# Altium PCB uku20710_face.PcbDoc
Units mm, origin at the board's own origin, x right, y up, seen from the top; angles counter-clockwise.
Board outline 354.7 x 156.7 mm, 2 copper layers (Top Layer, Bottom Layer); 57 components, 517 nets, 242 pads, 122 vias.
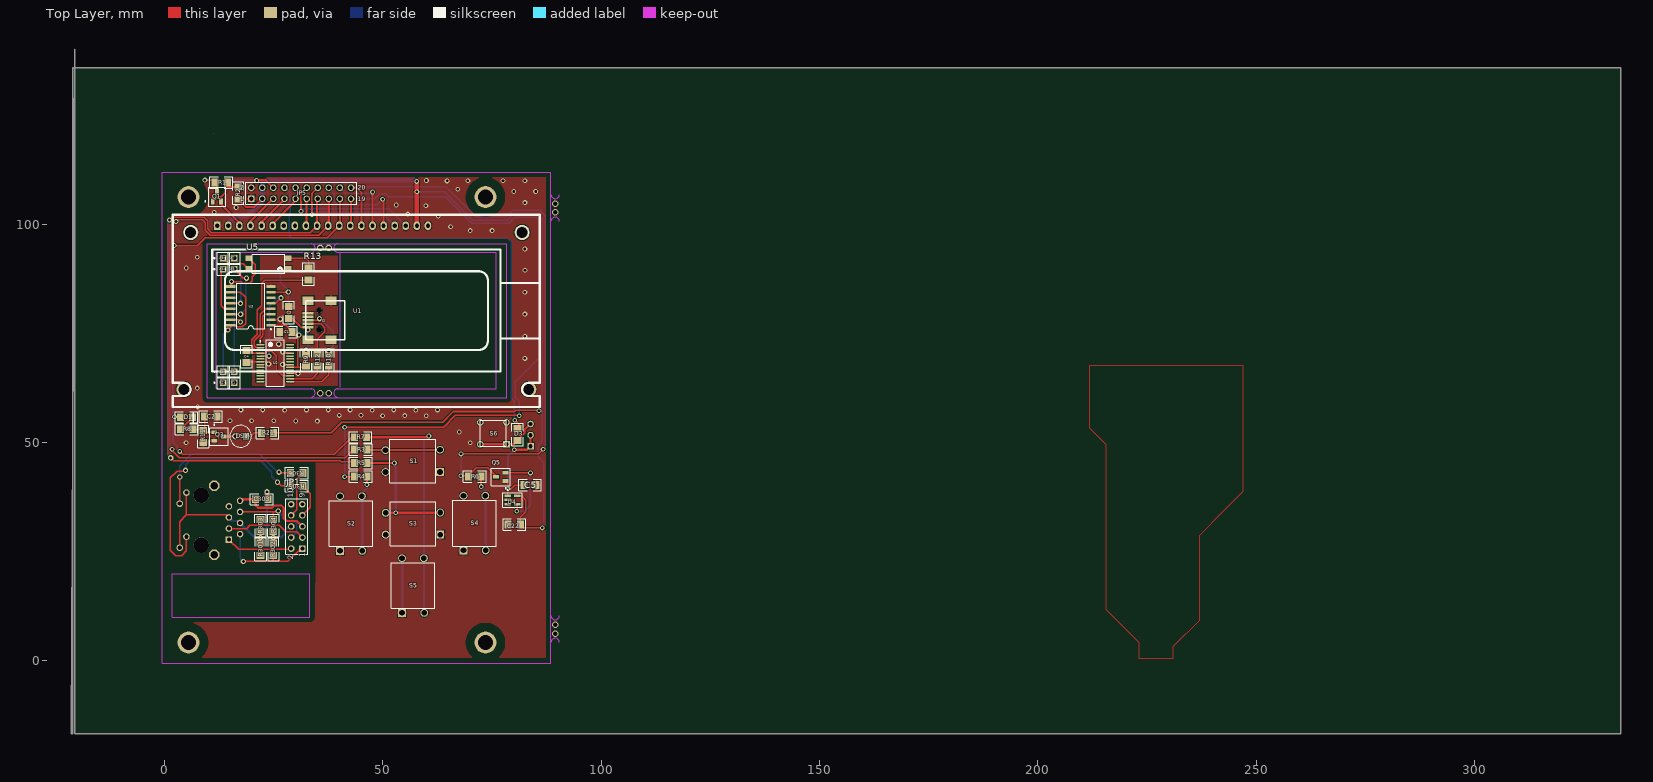
[diagram p0: Top Layer view]
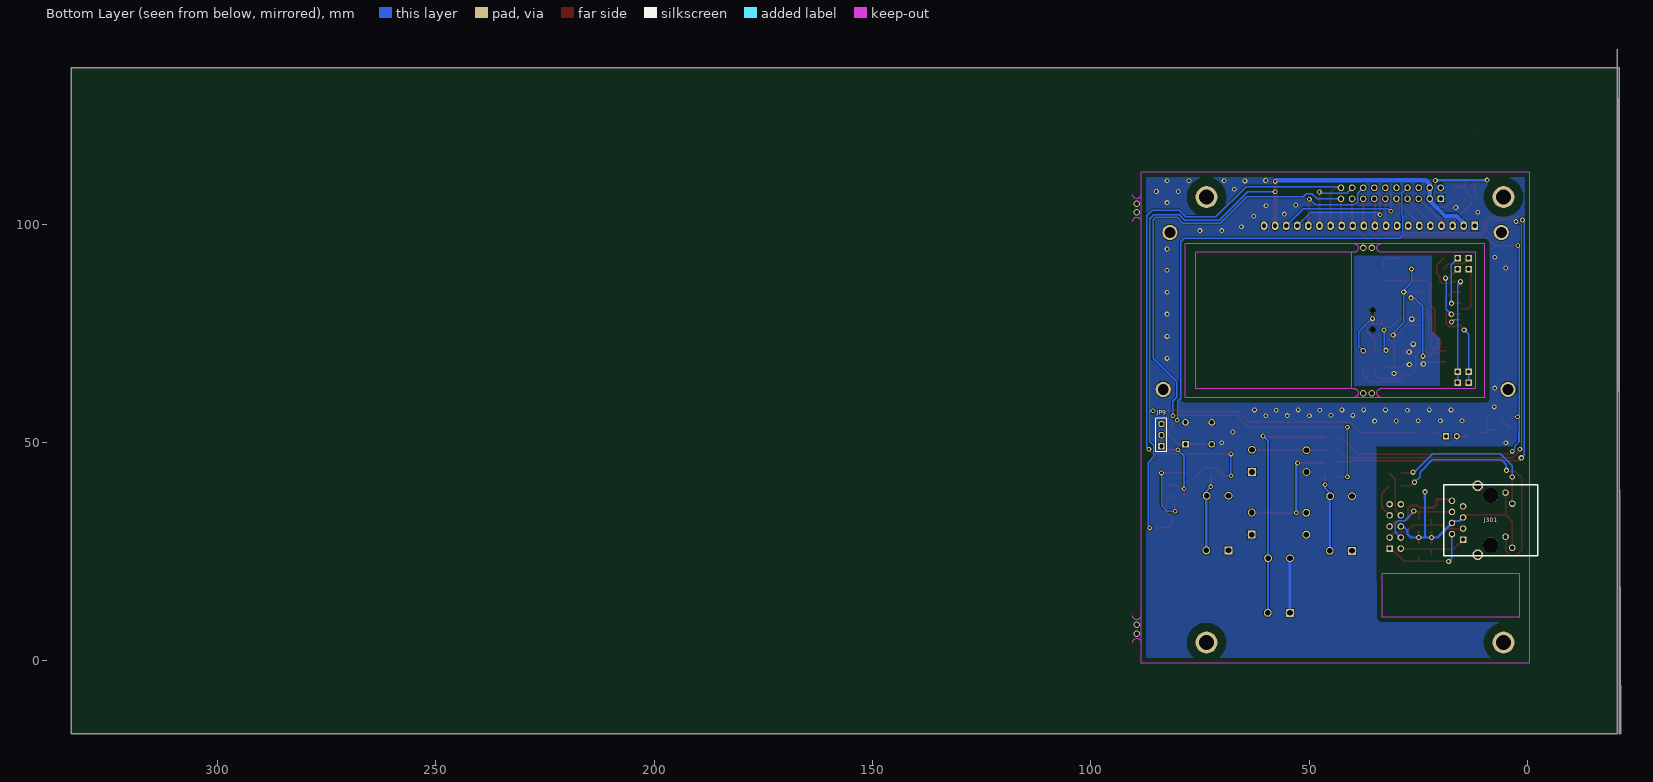
[diagram p1: Bottom Layer view, seen from below]

## Layer stack, top to bottom
Top Layer: signal copper 0.0356
Dielectric: dielectric 0.32, FR-4, Dk 4.8
Bottom Layer: signal copper 0.0356

## Board outline
-20.6,140 -20.6,-16.7 333.4,-16.7 333.4,135.85 -20.95,135.85 -20.95,-16.7 -21.3,-16.7

## Design rules (kind name [scope] priority, off if disabled: settings)
Clearance Keep_out_usb [OnLayer('Keep-Out Layer') vs InPoly and InNet(GND_USB)] p1: gap=0.3
Clearance Keep_out_poly [OnLayer('Keep-Out Layer') vs InPoly] p2: gap=1
Clearance Holes [InPoly vs HasPad('Free-0') Or HasPad('Free-1') Or HasPad('Free-2') Or HasPad('Free-3')] p3: gap=2
Clearance Keep_Out [OnLayer('Keep-Out Layer')] p4: gap=0.45
Clearance "Для разъёма и индикатора" [InComponent(JP5) or InComponent(U2)] p5: gap=0.3
Clearance [All] p6: gap=0.2
ComponentClearance [All] p1: gap=0.254 collisioncheckmode=0
HoleSize [All] p1: absolutevalues=TRUE maxlimit=5 minlimit=0.025 maxpercent=80.000 minpercent=20.000
PolygonConnect [InComponent(J1) and HasPad('J1-5')] p1: connectstyle=Relief reliefconductorwidth=0.3 reliefentries=4 polygonreliefangle="90 Angle"
PolygonConnect PolygonConnect_1 [All] p2: connectstyle=Relief reliefconductorwidth=0.5 reliefentries=4 polygonreliefangle="90 Angle"
RoutingLayers [All] p1: top layer=Horizontal bottom layer=Vertical
RoutingVias [All] p1: holewidth=0.7 width=1.2 viastyle="Through Hole" minholewidth=0.6 minwidth=1.1 maxholewidth=0.7 maxwidth=1.2
SolderMaskExpansion [All] p1: expansion=0.102
TestPointUsage [All] p1: valid=0 allowmultiple=FALSE
Testpoint [All] p1: side=15 testpointundercomponent=TRUE minsize=1.016 maxsize=2.54 preferedsize=1.524 minholesize=0 maxholesize=1.016 preferedholesize=0.813 testpointgrid=0.025 style=1023 order=1234567890
Width [All] p1: maxlimit=2 minlimit=0.2 preferedwidth=0.254 toplayer_prefwidth=0.3 bottomlayer_prefwidth=0.3 minimp=50.000000 maximp=50.000000 favimp=50.000000
15 further rules are at their usual default settings.

## Classes and differential pairs
component class USB: C1 C3 C4 J1 R9 R10 R12 R13 U2 U3 U5 X1 X2 X3 X4 X5 X6 X7 X8
component class uku206: A? BT? C2 C5 C22 D1 D3 DS1 JP5 JP9 Q1 Q3 Q5 R1 R2 R3 R4 R5 R6 R7 R8 R11 R21 S1 S2 S3 S4 S5 S6 U1 U4 UU1 UU3 UU5 UU7 UU9
component class LAN: C303 J301 JP1 R301 R302 R303 R304 R305 R306

## Components (designator, comment, footprint, x,y, rotation, side; value= is the part's Value field where it differs from the comment)
C1 "1.0" _1206#1 27.807,75.319 r0 top
C2 "1.0" _1206#2 10.603,55.914 r180 top
C3 "1.0" C3216-1206 28.457,79.77 r270 top
C4 "1.0" C3216-1206 18.755,69.668 r90 top
C5 "1.0" _1206#1 83.697,40.26 r180 top
C22 "1.0" _1206#1 80.1,31.25 r180 top (schematic designator C?)
C303 "0.1" C3216-1206 22.25,37 r0 top
D1 "LL4148" _1206d#1 5.048,55.778 r180 top
D3 "LL4148" _1206d#2 80.85,51.85 r90 top
DS1 "LED0" el3 18.697,51.427 r180 top
J1 "miniUSB" USBmini 41.31,78 r90 top
J301 "J0011D21B" J0011D21B 8.402,32.208 r270 bottom
JP1 "Header 10H" HDR2X5 31.558,25.706 r90 top
JP5 "PLHD-20" HDR2X10 19.85,105.8 r0 top
JP9 "PLS-3" HDR1X3 83.821,49.162 r90 bottom
Q1 "BC856" SO-G3#1 12,106.3 r0 top
Q3 "BC846" SO-G3#2 12.5,51.377 r270 top
Q5 "IRLML2402" SO-G3#1 77,42.15 r90 top (schematic designator Q?)
R1 "2K2" _1206#3 13,109.5 r0 top (schematic designator R90)
R2 "7K5" _1206#3 16.9,107.1 r270 top (schematic designator R89)
R3 "2K7" _1206#1 44.95,48.4 r180 top
R4 "2K7" _1206#1 44.95,42.2 r180 top
R5 "2K7" _1206#1 44.95,45.3 r180 top
R6 "2K7" _1206#1 71.05,42.2 r180 top
R7 "2K7" _1206#3 44.9,51.2 r180 top (schematic designator R11)
R8 "2K7" _1206#2 5.097,53.027 r180 top
R9 "1R" _1206#1 32.408,68.867 r270 top
R10 "20R" _1206#1 37.609,68.867 r270 top
R11 "10K" _1206#2 8.897,51.377 r270 top
R12 "20R" _1206#1 35.009,68.867 r270 top
R13 "200R" _1206#1 33.008,88.572 r90 top (schematic designator R?)
R21 "270R" _1206#2 23.603,52.227 r0 top
R301 "49.9R" _1206#1 22.006,25.556 r90 top
R302 "49.9R" _1206#1 24.906,25.556 r270 top
R303 "49.9R" _1206#1 22.006,30.958 r270 top
R304 "49.9R" _1206#1 24.906,31.008 r90 top
R305 "K10" _1206#1 30.3,40.05 r0 top
R306 "K10" _1206#1 30.3,43.05 r0 top
S1 "SWT-9" SWT-9 63.1,43.25 r180 top (schematic designator S2)
S2 "SWT-9" SWT-9 40.2,25.2 r90 top (schematic designator S4)
S3 "SWT-9" SWT-9 63.15,28.9 r180 top (schematic designator S1)
S4 "SWT-9" SWT-9 68.47,25.3 r90 top (schematic designator S5)
S5 "SWT-9" SWT-9 54.4,11 r90 top (schematic designator S3)
S6 "SWT-6" SWT-6 78.3,49.6 r180 top
U1 "AG1232G" AG1232G 43.95,80.2 r0 top (schematic designator U4)
U2 "FT232R" SOP65P780-28L 25.356,68.167 r0 top
U3 "ISO7231" SO-G16/D10.4 19.755,81.27 r90 top
U4 "TPS3823" SO-G5/P.95 79.7,36.85 r270 top (schematic designator U?)
U5 "FOD817ASD" FOD817ASD 28.307,89.723 r90 top
X1 "" PIN1 16,63.7 r90 top
X2 "" PIN1 13.5,63.7 r90 top
X3 "" PIN1 16,66.2 r90 top
X4 "" PIN1 13.5,66.2 r90 top
X5 "" PIN1 16,89.7 r90 top
X6 "" PIN1 13.5,89.7 r90 top
X7 "" PIN1 16,92.2 r90 top
X8 "" PIN1 13.5,92.2 r90 top

## Footprints (in the part's own frame and the unit in brackets; to place one, negate y for a bottom-side part, rotate by r counter-clockwise, add the part's x,y. Pads: shape width x height; smd on the part's side, far side on the other; paste and mask are expansions set on the pad)
_1206#1 [mm]
  rect 1.6x1.8 smd: 1(-1.412,-0.007) 2(1.388,-0.007)
  silkscreen extent -2.61,-1.31 2.59,1.29
_1206#2 [mm]
  rect 1.6x1.8 smd: 1(-1.409,-0.014) 2(1.391,-0.015)
  silkscreen extent -2.61,-1.31 2.59,1.29
_1206#3 [mm]
  rect 1.6x1.8 smd: 1(-1.4,0) 2(1.4,0)
  silkscreen extent -2.6,-1.3 2.6,1.3
_1206d#1 [mm]
  rect 1.6x1.8 smd: 1(1.403,-0.017) 2(-1.397,-0.017)
  silkscreen extent -2.6,-1.32 2.6,1.28
_1206d#2 [mm]
  rect 1.6x1.8 smd: 1(1.405,0.012) 2(-1.395,0.012)
  silkscreen extent -2.6,-1.29 2.6,1.31
AG1232G [mm]
  rect 1.5x2 hole 0.95: 1(-31.877,19.431)
  oval 1.5x2 hole 0.95: 2(-29.337,19.431) 3(-26.797,19.431) 4(-24.257,19.431) 5(-21.717,19.431) 6(-19.177,19.431) 7(-16.637,19.431) 8(-14.097,19.431) 9(-11.557,19.431) 10(-9.017,19.431) 11(-6.477,19.431) 12(-3.937,19.431) 13(-1.397,19.431) 14(1.143,19.431) 15(3.683,19.431) 16(6.223,19.431) 17(8.763,19.431) 18(11.303,19.431) 19(13.843,19.431) 20(16.383,19.431)
  silkscreen extent -42.04,-22.1 41.96,21.97
C3216-1206 [mm]
  rect 1.6x1.8 smd: 1(-1.4,0) 2(1.4,0)
  silkscreen extent -2.6,-1.3 2.6,1.3
el3 [mm]
  rect 1.4x1.4 hole 0.85: 1(0.012,-0.009)
  round 1.4 hole 0.85: 2(2.512,-0.009)
  silkscreen extent -1.24,-2.51 3.76,2.49
FOD817ASD [mm]
  rect 1.3x1.5 smd: 1(0,0) 2(2.5,0) 3(2.5,9) 4(0,9)
  silkscreen extent -0.97,0.75 3.4,8.22
HDR1X3 [mm]
  rect 1.5x1.5 hole 1: 1(0,0)
  round 1.5 hole 1: 2(2.54,0) 3(5.08,0)
  silkscreen extent -1.27,-1.27 6.35,1.27
HDR2X5 [mm]
  rect 1.5x1.5 hole 0.9: 1(0,0)
  round 1.5 hole 0.9: 2(0,2.54) 3(2.54,0) 4(2.54,2.54) 5(5.08,0) 6(5.08,2.54) 7(7.62,0) 8(7.62,2.54) 9(10.16,0) 10(10.16,2.54)
  silkscreen extent -1.27,-1.27 11.43,3.81
HDR2X10 [mm]
  rect 1.5x1.5 hole 1: 1(0,0)
  round 1.5 hole 1: 2(0,2.54) 3(2.54,0) 4(2.54,2.54) 5(5.08,0) 6(5.08,2.54) 7(7.62,0) 8(7.62,2.54) 9(10.16,0) 10(10.16,2.54) 11(12.7,0) 12(12.7,2.54) 13(15.24,0) 14(15.24,2.54) 15(17.78,0) 16(17.78,2.54) 17(20.32,0) 18(20.32,2.54) 19(22.86,0) 20(22.86,2.54)
  silkscreen extent -1.27,-1.27 24.13,3.81
J0011D21B [mm]
  round 2.5 hole 1.8: 0(-7.9,-3) 0(7.9,-3)
  round 3.5 hole 3.5: 0(-5.7,0) 0(5.7,0)
  rect 1.5x1.5 hole 0.95: 1(4.445,-6.35)
  round 1.5 hole 0.95: 2(3.175,-8.9) 3(1.905,-6.35) 4(0.635,-8.9) 5(-0.635,-6.35) 6(-1.905,-8.9) 7(-3.175,-6.35) 8(-4.445,-8.9) 9(6.31,4.9) 10(3.77,3.38) 11(-3.8,4.9) 12(-6.31,3.38)
  silkscreen extent -8.1,-10.8 8.1,10.8
PIN1 [mm]
  rect 1.5x1.5 hole 0.9: 1(0,0)
  silkscreen extent -1.4,-1.4 1.4,2.17
SO-G3#1 [mm]
  rect 0.85x1.3 smd: 1(-0.948,-1.102) 2(0.952,-1.102) 3(0.002,1.098)
  silkscreen extent -2.77,-2.15 2,2.15
SO-G3#2 [mm]
  rect 0.85x1.3 smd: 1(-0.944,-1.105) 2(0.956,-1.105) 3(0.006,1.095)
  silkscreen extent -2.77,-2.16 2.01,2.14
SO-G5/P.95 [mm]
  rect 0.55x1.45 smd: 1(-0.95,-1.075) 2(0,-1.075) 3(0.95,-1.075) 4(0.95,1.075) 5(-0.95,1.075)
  silkscreen extent -2.42,-2.2 1.65,2.2
SO-G16/D10.4 [mm]
  rect 0.6x2.15 smd: 1(-4.445,-4.625) 2(-3.175,-4.625) 3(-1.905,-4.625) 4(-0.635,-4.625) 5(0.635,-4.625) 6(1.905,-4.625) 7(3.175,-4.625) 8(4.445,-4.625) 9(4.445,4.625) 10(3.175,4.625) 11(1.905,4.625) 12(0.635,4.625) 13(-0.635,4.625) 14(-1.905,4.625) 15(-3.175,4.625) 16(-4.445,4.625)
  silkscreen extent -5.42,-4.75 5.2,3.15
SOP65P780-28L [mm]
  oval 1.8x0.35 smd: 1(-3.396,4.231) 2(-3.396,3.581) 3(-3.396,2.931) 4(-3.396,2.281) 5(-3.396,1.631) 6(-3.396,0.981) 7(-3.396,0.331) 8(-3.396,-0.319) 9(-3.396,-0.969) 10(-3.396,-1.619) 11(-3.396,-2.269) 12(-3.396,-2.919) 13(-3.396,-3.569) 14(-3.396,-4.219) 15(3.404,-4.219) 16(3.404,-3.569) 17(3.404,-2.919) 18(3.404,-2.269) 19(3.404,-1.619) 20(3.404,-0.969) 21(3.404,-0.319) 22(3.404,0.331) 23(3.404,0.981) 24(3.404,1.631) 25(3.404,2.281) 26(3.404,2.931) 27(3.404,3.581) 28(3.404,4.231)
  silkscreen extent -3.52,-5.29 2.1,5.31
SWT-6 [mm]
  rect 1.5x1.5 hole 1: 1(-0.009,-0.001)
  round 1.5 hole 1: 1(5.991,-0.001) 2(-0.009,-5.001) 2(5.991,-5.001)
  silkscreen extent -0.01,-5.5 5.99,0.5
SWT-9 [mm]
  rect 1.8x1.8 hole 1.3: 1(0,0)
  round 1.8 hole 1.3: 1(12.5,0) 2(0,-5.08) 2(12.5,-5)
  silkscreen extent 1,-7.5 11.5,2.5
USBmini [mm]
  round 1.2 hole 1.2: 0(-2.2,5.85) 0(2.2,5.85)
  rect 0.5x2.5 smd: 1(-1.6,8.43) 2(-0.8,8.43) 3(0,8.43) 4(0.8,8.43) 5(1.6,8.45)
  rect 2x2.5 smd: 6(-4.45,8.43) 6(-4.45,3.158) 6(4.45,8.43) 6(4.45,3.158)
  silkscreen extent -4.45,0 4.45,9

## Part data
C1 C3 C4 C303: library part "Cap Semi", "Capacitor (Semiconductor SIM Model)"
C2 C5 C22: library part "Cap Semi", "Capacitor"
D1: library part Diode, "Diode"
D3: library part Diode, "Default Diode"
DS1: "Typical INFRARED GaAs LED"
J1: library part "Header 6", "Header, 6-Pin"
JP1: "Header, 10-Pin, Right Angle"
JP5: library part "Header 10X2", "Header, 10-Pin, Dual row"
JP9: library part "Header 3", "Header, 3-Pin"
Q1: library part GT109
Q3: library part GT122, "Bipolar transistor"
Q5: "HEXFET Power MOSFET"
R1 R2 R3 R4 R5 R6 R7 R8 R11 R21 R301 R302 R303 R304 R305 R306: library part Res2, "Resistor"
R9 R10 R12 R13: library part RES
S1 S2 S3 S4 S5: "Switch"
S6: library part SWT-9, "Switch"
U4: "Reset IC"
U5: library part F00817ASD
X1 X2 X3 X4 X5 X6 X7 X8: library part Socket, "Socket"

## Free pads (board coordinates)
  round 5 hole 3.5: 0(5.5,4.2) 0(5.5,106.2) 0(73.5,4.2) 0(73.5,106.2)
  round 3.5 hole 2.5: 51(6,98.1) 52(4.45,62.15) 53(83.4,62.15) 54(81.9,98.1)

## Via types
v1: diameter 1.1, hole 0.6, Top Layer to Bottom Layer, 82 vias
v2: diameter 1.2, hole 0.7, Top Layer to Bottom Layer, 30 vias
v3: diameter 1.5, hole 1, Top Layer to Bottom Layer, 8 vias
v4: diameter 1.27, hole 0.711, Top Layer to Bottom Layer, 2 vias

## Nets (pads, with @x,y where several pads share a name; then routed paths per layer and width w, separated by ;. In a path a pad name is that pad's centre, name@x,y a point inside that pad or via, vN(x,y) a via of type N, cw(c..) or ccw(c..) an arc to the next point about the centre after c; other vN are vias at no path point)
+1.8V: 
+3.3V: 
+3V3: 
+5V: 
+5V_IZ: 
+IAKB1: 
+IAKB2: 
+UOUT: 
-5V: 
-5V_IZ: 
-IAKB1: 
-IAKB2: 
-UOUT: 
BAT: 
CANH: 
CANL: 
DB0: JP5.13 R5.2 U1.10 | length 140.9
  Top Layer w0.3: v2(1.175,100.925) 1.775,101.525 9.15,101.525 9.875,100.8 9.875,98.9 10.725,98.05 33.352,98.05 U1.10 ; v2(1.425,46.5) 2.075,45.85 40.125,45.85 40.425,45.55 43.319,45.55 R5.2
  Top Layer w0.5: U1.10 34.933,105.643 JP5.13
  Bottom Layer w0.3: v2(1.175,100.925) 0.775,100.525 0.775,47.15 v2(1.425,46.5)
DB1: JP5.15 R3.2 U1.11 | length 141.3
  Top Layer w0.3: v1@1.8,48.5 v1(1.75,48.45) 1.75,48.162 3.351,46.562 41.41,46.562 43.361,48.512 R3.2@43.511,48.512 ; v1(2.65,100.6) 3,100.95 8.775,100.95 9.35,100.375 9.35,98.65 10.5,97.5 35.342,97.5 U1.11
  Top Layer w0.5: U1.11 37.63,99.788 JP5.15
  Bottom Layer w0.25: v1(1.75,48.45) 1.3,48.9 1.3,99.7 2.2,100.6 v1(2.65,100.6)
DB2: D1.1 JP5.17 R7.2 U1.12 | length 137.5
  Top Layer w0.3: v1(2.25,95.1) 7.5,95.1 9.3,96.9 37.282,96.9 U1.12 ; v1(2.286,55.914) 2.301,55.9 3.614,55.9 D1.1@3.65,55.864 ; v1(3.501,47.962) 4.201,47.262 38.91,47.262 42.848,51.2 R7.2
  Top Layer w0.5: U1.12 40.17,99.788 JP5.17
  Bottom Layer w0.3: 1.9,52.713 1.9,55.914 v1@1.9,55.964 ; v1(2.25,95.1) 1.9,94.75 v1@1.9,55.964 ; v1(2.286,55.914) 2.251,55.914 2.201,55.964 v1@1.9,55.964
  Bottom Layer w0.4: 1.95,52.713 1.95,50.212 2.95,49.213 2.95,48.513 v1(3.501,47.962)
DB3: JP5.19 R4.2 U1.13 | length 155.6
  Top Layer w0.3: v1(41.25,42.15) 41.307,42.207 R4.2 ; v1(41.25,53.5) 63.9,53.5 66.6,56.2 81.2,56.2 v1(81.25,56.15)
  Top Layer w0.5: U1.13 42.71,99.788 JP5.19
  Bottom Layer w0.3: v1(41.25,42.15) v1(41.25,53.5) ; JP5.19@42.65,105.85 42.7,105.8 JP5.19 48.15,105.8 49.35,107 50.65,107 51.4,106.25 64.3,106.25 70.3,100.25 78.9,100.25 80.25,101.6 85.1,101.6 85.65,101.05 85.65,69.25 80.35,63.95 80.35,60.4 81.25,59.5 v1(81.25,56.15)
DB4: JP5.20 Q5.3 R6.2 U1.14 | length 146.9
  Top Layer w0.3: v1(67.85,42.4) 67.9,42.35 69.55,42.35 71.4,44.2 74.05,44.2 75.85,42.4 75.85,42.152 Q5.3@75.85,42.1 ; v1(67.9,47.4) 85.65,47.4 v1(86.7,48.45)
  Top Layer w0.4: JP5.20@42.69,108.34 JP5.20 ; JP5.20@42.7,108.33 JP5.20 ; U1.14 45.093,107.257 44.01,108.34 JP5.20
  Bottom Layer w0.3: JP5.20 42.97,108.6 64.45,108.6 71.35,101.7 78.3,101.7 79.8,103.2 85.95,103.2 86.95,102.2 87.2,101.95 ; v1(67.85,42.4) 67.9,42.45 v1(67.9,47.4) ; v1(86.7,48.45) 87.2,48.95 ; 87.199,48.95 87.199,101.95
DB5: JP5.18 U1.15 | length 15.9
  Top Layer w0.4: U1.15 47.633,107.333 v1(47.65,107.35)
  Bottom Layer w0.3: JP5.18@40.1,108.35 40.11,108.34 JP5.18 41.433,107.077 47.377,107.077 v1(47.65,107.35)
DB6: JP5.16 U1.16 | length 21.9
  Top Layer w0.4: v1(49.95,105.7) 50.173,105.477 U1.16 50.154,99.65 U1.16@50.1,99.65
  Bottom Layer w0.3: JP5.16 38.9,107.07 38.9,105.15 39.65,104.4 48.65,104.4 v1(49.95,105.7)
DB7: JP5.14 U1.17 | length 27.2
  Top Layer w0.3: 33.75,104.976 33.75,106.468 33.759,106.477
  Top Layer w0.4: v1(33.75,102.15) 33.75,104.976 ; 33.759,106.477 33.759,107.008 JP5.14
  Bottom Layer w0.4: v1(33.75,102.15) 34.25,102.65 49.694,102.65 U1.17
DT1: 
DT2: 
DT3: 
DT4: 
DT5: 
GND_P: 
GND_USB: C1.1 C3.1 C4.1 J1.5 J1.6@38.153,82.45 U2.7 U2.18 U2.21 U2.25 U2.26 U3.2 U3.8 | length 12.7
  Top Layer w0.3: C4.1@18.805,68.267 19.036,68.498 23.325,68.498 v2(23.856,67.967) ; v2@27.057,70.718 v2(27.107,70.718) ; v2@27.207,67.867 27.226,67.848 U2.21 ; U2.26@28.707,71.118 27.507,71.118 v2(27.107,70.718) ; U2.18 30.426,65.898 v2@30.758,65.567 ; U2.25 27.376,70.448 v2(27.107,70.718)
  Bottom Layer w0.3: v2@27.057,70.718 v2(27.107,70.718)
  other v2: 30.597,65.817 27.057,67.867
  other v4: 26.157,72.518 26.497,78.27
NetA1_1: 
NetA1_2: 
NetBT2_1: 
NetBT2_2: 
NetBT700_1: 
NetC1_2: C1.2 R9.2 U2.20 U3.1 U3.7 U5.1 | length 41
  Top Layer w0.3: U3.1 27.801,76.825 C1.2@29.207,75.419 ; U3.7 28.333,84.445 v2@28.357,84.421 ; v2(26.557,89.723) U5.1 ; U2.20 32.19,67.198 R9.2@32.458,67.467 ; C1.2 30.323,74.184 30.558,73.949 30.558,67.217 ; v2@30.358,74.219 v2(30.758,74.619)
  Bottom Layer w0.3: v2(26.557,89.723) 26.557,86.65 28.357,84.85 28.357,77.369 30.758,74.969 v2(30.758,74.619)
  other v2: 28.357,84.471
NetC2_1: C2.1 C5.1 C22.2 JP5.1 JP5.2 Q3.2 R11.2 S1.1 S2.1 S3.1 S4.1 S5.1 S6.2 U1.1 U1.20 U4.2 | length 12.5
  Bottom Layer w0.6: S5.1@54.4,11 54.4,23.5 S5.1@54.4,23.505
  other v1: 4.951,49.963 70.018,49.963 67.517,52.413 35.009,54.9 30.05,54.914 15.004,54.964 19.95,54.964 25.006,55 49.95,56.114 59.95,56.114 55.014,56.164 40.01,56.2 45.011,56.264 27.507,57.4 47.562,57.4 57.514,57.4 17.504,57.464 22.506,57.464 32.508,57.464 37.509,57.464 42.511,57.464 52.513,57.464 62.516,57.464 7.602,58.165 7.502,62.466 82.521,69.267 82.521,74.3 82.521,79.4 82.521,84.4 82.55,89.423 5.001,89.973 7.502,92.4 82.521,94.3 70.018,98.525 75.019,98.525 65.517,99.4 62.666,101.8 55.714,102.3 11.403,102.726 16.404,103.8 59.85,104.226 53.05,104.376 82.521,104.926 79.97,107.477 84.971,107.477 67.167,108 64.716,109.9 69.468,109.928 77.52,109.928 82.521,109.928 59.965,110
NetC2_2: C2.2 Q3.1 R8.1 R11.1 | length 8.3
  Top Layer w0.3: R8.1@6.55,52.963 8.8,52.963 8.86,52.903 8.93,52.833 9.463,52.3 11.394,52.3 Q3.1@11.453,52.3
  Top Layer w0.4: R11.1@8.86,52.903 9.211,53.255 C2.2
NetC3_2: C3.2 J1.1 R9.1 | length 11.5
  Top Layer w0.3: C3.2 29.357,78.37 31.358,76.369 32.858,76.369 v2(32.858,75.769) ; R9.1 32.408,70.286 v2(32.408,71.118)
  Bottom Layer w0.3: v2(32.408,71.118) 32.408,71.218 32.858,71.668 v2(32.858,75.769)
NetC4_2: C4.2 U2.4 U2.17 | length 14.7
  Top Layer w0.3: C4.2 19.755,71.068 20.375,70.448 22.936,70.448 23.406,70.918 24.506,70.918 25.606,69.818 25.606,66.667 27.025,65.248 U2.17
NetC5_2: C5.2 JP9.1 JP9.2 Q5.1 U4.1 | length 23.9
  Top Layer w0.3: Q5.1@78.05,41.2 78.075,41.175 78.625,40.625 U4.1 ; Q5.1 Q5.1@78.149,41.202 ; v1@78.67,39.46 79.43,39.46 80.237,40.267 C5.2
  Top Layer w0.5: v1(80.07,48.362) 80.082,48.35 83,48.35 83.8,49.15 83.8,49.162 83.8,51.702 JP9.2@83.8,51.74
  Bottom Layer w0.5: v1(78.625,39.4) 78.625,46.917 v1(80.07,48.362)
NetC11_1: 
NetC11_2: 
NetC12_2: 
NetC14_2: 
NetC21_1: 
NetC22_1: C22.1 JP5.3 JP5.4 R2.2 R21.2 U1.2 U1.19 U4.5 | length 249.2
  Top Layer w0.3: U4.5@80.75,37.85 80.775,37.825 U4.5 81.75,37.8 82.75,36.8 82.75,34.15 81.5,32.9 81.5,31.257 81.5,31.25 81.503,31.247 82.3,30.45 v1(86.5,30.45)
  Top Layer w0.4: R21.2 38.159,52.212 40.61,54.664 63.716,54.664 66.152,57.1 80.135,57.1 80.4,57.364 85.65,57.364 v1(85.75,57.264)
  Top Layer w0.5: R2.2 18.7,103.9 20.49,103.9 JP5.3
  Top Layer w1: v1(57.75,109.8) 57.793,109.757 v1(57.793,107.4) U1.19
  Bottom Layer w0.3: v1(57.793,107.4) 64.1,107.4 70.6,100.9 78.5,100.9 79.8,102.2 85.55,102.2 86.5,101.25 86.5,50.3 85.6,49.4 85.6,46.7 86.9,45.4 86.9,30.65 86.7,30.65 v1(86.5,30.45)
  Bottom Layer w0.4: v1(85.75,57.264) 86.372,57.264 86.472,57.364
  Bottom Layer w1: U1.2 14.613,100.213 16.25,101.85 18.9,101.85 22.39,105.34 JP5.3 JP5.4 22.39,109.14 23.3,110.05 57.5,110.05 v1(57.75,109.8)
NetC23_1: 
NetC33_1: 
NetC35_2: 
NetC36_2: 
NetC50_2: 
NetC51_2: 
NetC52_2: 
NetC53_2: 
NetC61_1: 
NetC61_2: 
NetC62_2: 
NetC63_2: 
NetC66_1: 
NetC303_1: C303.1 J301.8 JP1.5 | length 19.6
  Top Layer w0.5: J301.8 17.649,37 C303.1 20.85,35.675 21.475,35.05 24.65,35.05 25.2,35.6 26.725,35.6 27.325,35 27.325,32.575 27.85,32.05 30.294,32.05 JP1.5
NetC303_2: C303.2 J301.4 J301.5 J301.9 J301.12 JP1.6 R301.2 R302.1 R303.2 R304.1 | length 58.5
  Top Layer w0.3: J301.9@3.475,25.85 3.475,31.875 5.022,33.422 ; J301.12 5.022,33.422 ; J301.5 14.173,33.422 5.022,33.422
  Top Layer w0.5: R303.2 21.999,26.957 R301.2 ; v2(23.5,38.7) 23.65,38.55 C303.2 ; R302.1 24.913,26.982 R304.1
  Bottom Layer w0.5: J301.5 15.57,32.025 16.85,32.025 J301.4 20.625,28.25 v2(24.9,28.25) 24.913,28.237 v2@24.913,28.2 ; 23.475,28.25 23.475,38.675 v2(23.5,38.7) ; v2@24.913,28.25 26.7,28.25 27.45,29 27.45,29.8 28.436,30.786 JP1.6
  other v2: 22,28.25
NetC500_2: 
NetC502_1: 
NetC502_2: 
NetC505_1: 
NetC505_2: 
NetC508_1: 
NetC510_1: 
NetC511_1: 
NetC511_2: 
NetC512_2: 
NetC513_2: 
NetC514_1: 
NetC516_1: 
NetC516_2: 
NetC517_1: 
NetC700_1: 
NetC700_2: 
NetC701_1: 
NetC702_1: 
NetC704_2: 
NetC705_2: 
NetC706_1: 
NetC707_1: 
NetC707_2: 
NetC709_1: 
NetC709_2: 
NetC710_1: 
NetC713_1: 
NetC714_1: 
NetC715_1: 
NetD1_2: D1.2 R8.2 | length 3.9
  Top Layer w0.3: R8.2@3.701,53 3.701,53.042 3.701,53.064 6.431,55.794 D1.2
NetD3_1: D3.1 JP5.8 | length 106.5
  Top Layer w0.5: v1@80.22,55.214 80.27,55.159 81.438,53.862 D3.1@81.438,53.305
  Bottom Layer w0.3: JP5.8 28.75,107.06 28.75,102.3 28.6,102.15 28.6,97.4 29.2,96.8 78.6,96.8 79.45,95.95 79.45,60.15 80.1,59.5 80.1,55.2 80.153,55.147 80.17,55.164 v1@80.22,55.214
  other v1: 80.22,55.114
NetD3_2: D3.2 JP9.3 S6.1 | length 13.7
  Top Layer w0.5: S6.1@72.309,49.601 78.309,49.601 80.009,49.601 D3.2@80.67,50.263 ; D3.2 80.838,50.538 82.4,52.1 82.4,52.88 83.792,54.272 JP9.3@83.8,54.28
NetD5_1: 
NetD20_2: 
NetD500_1: 
NetD500_2: 
NetD501_1: 
NetD503_1: 
NetD505_1: 
NetD505_2: 
NetD506_1: 
NetD700_1: 
NetD701_1: 
NetD702_1: 
NetD703_2: 
NetD704_1: 
NetD705_1: 
NetD706_1: 
NetDS1_1: DS1.1 R21.1 | length 3.8
  Top Layer w0.4: DS1.1 19.778,51.435 20.554,52.212 R21.1
NetDS1_2: DS1.2 Q3.3 | length 2.6
  Top Layer w0.4: Q3.3 16.111,51.37 16.181,51.44 DS1.2@16.204,51.463
NetFU500_1: 
NetFU700_1: 
NetFU700_2: 
NetJ1_2: J1.2 R12.1 | length 11
  Top Layer w0.3: J1.2 35.85,77.2 36.725,76.325 36.725,75.378 35.009,73.661 35.009,70.286 R12.1
NetJ1_3: J1.3 R10.1 | length 12.7
  Top Layer w0.3: J1.3 35.125,78 v2(35.475,78.35) ; R10.1 37.603,71.011 v2(37.609,71.018)
  Bottom Layer w0.3: v2(35.475,78.35) 35.635,78.35 38.66,75.325 38.66,72.068 v2(37.609,71.018)
NetJ301_1: J301.1 JP1.2 R301.1 | length 16.7
  Top Layer w0.3: J301.1 16.959,25.556 28.868,25.556 JP1.2 ; 22.006,25.556 22.012,25.55 R301.1
NetJ301_2: J301.2 JP1.1 R302.2 | length 22.7
  Top Layer w0.3: v2(18.055,22.756) 18.105,22.806 28.257,22.806 31.158,25.706 JP1.1 ; R302.2 24.9,22.812 24.906,22.806
  Bottom Layer w0.3: J301.2 17.302,23.508 v2(18.055,22.756)
NetJ301_3: J301.3 JP1.3 R303.1 | length 19.6
  Top Layer w0.3: J301.3 18.828,30.303 19.525,31 26.275,31 27.75,29.525 30.279,29.525 JP1.3 ; R303.1 R303.1@22.005,32.37 ; 22,31 R303.1@22,32.4
NetJ301_6: J301.6 JP1.4 R304.2 | length 19.7
  Top Layer w0.3: J301.6 25.861,34.113 v2(26.057,34.309) ; 24.9,34.113 24.913,34.1 R304.2
  Bottom Layer w0.3: v2(26.057,34.309) 26.057,34.118 28.125,32.05 29.55,32.05 30.25,31.35 30.25,29.479 JP1.4
NetJ301_10: J301.10 R305.1 | length 57.4
  Top Layer w0.3: v2(4.825,43.625) 4.675,43.475 2.95,43.475 1.375,41.9 1.375,25.3 2.575,24.1 3.9,24.1 5.022,25.222 J301.10 ; v2(25.9,40.9) 26.757,40.043 R305.1
  Bottom Layer w0.3: v2(4.825,43.625) 4.825,44.875 5.95,46 21.775,46 24.6,43.175 24.6,42.2 v2(25.9,40.9)
NetJ301_11: J301.11 R306.1 | length 37
  Top Layer w0.3: J301.11 v2(3.502,42.127) ; v2(26.2,43.2) 26.357,43.043 R306.1
  Bottom Layer w0.3: v2(3.502,42.127) 3.502,44.655 6.247,47.4 21.725,47.4 25.925,43.2 v2(26.2,43.2)
NetJP1_7: JP1.7 R305.2 | length 8.2
  Top Layer w0.3: JP1.7 33.425,35.194 33.425,38.325 31.697,40.053 R305.2@31.675,40.075
NetJP1_8: JP1.8 R306.2 | length 10.8
  Top Layer w0.3: JP1.8 30.3,34.609 30.3,41.55 31.688,42.938 R306.2
NetJP1_9: 
NetJP3_3: 
NetJP3_3: 
NetJP5_5: JP5.5 U1.4 | length 8.4
  Top Layer w0.5: U1.4 19.693,100.643 24.85,105.8 JP5.5
NetJP5_6: JP5.6 Q1.3 R1.1 | length 21
  Top Layer w0.4: v1(9.252,110.078) 10.972,110.078 11.575,109.475 11.6,109.45 R1.1@11.655,109.395
  Top Layer w0.5: Q1.3@12.049,107.102 12.049,107.398 R1.1@12.049,109.002 ; v1@21.1,110.05 23.22,110.05 JP5.6
  Bottom Layer w0.5: v1(9.252,110.078) 9.28,110.05 v1@21.1,110.05
  other v1: 21.1,110
NetJP5_7: JP5.7 U1.5 | length 8.3
  Top Layer w0.5: U1.5 22.233,100.433 27.47,105.67 JP5.7
NetJP5_9: JP5.9 U1.6 | length 8.3
  Top Layer w0.5: U1.6 24.773,100.123 30.01,105.36 JP5.9
NetJP5_10: JP5.10
NetJP5_11: JP5.11 U1.9 | length 6.2
  Top Layer w0.5: U1.9 32.55,99.788 JP5.11
NetJP5_12: JP5.12 U1.18 | length 31.8
  Top Layer w0.3: 31.25,105.176 31.25,106.527
  Top Layer w0.4: v1(31.25,102.95) 31.25,105.176 ; 31.25,106.527 31.25,107.04 JP5.12
  Bottom Layer w0.4: v1(31.25,102.95) 31.85,103.55 51.334,103.55 U1.18
NetJP11_1: 
NetQ1_1: Q1.1 R1.2 R2.1 | length 8.7
  Top Layer w0.3: Q1.1@11.052,105.252 12.05,106.25 12.998,106.25 13.95,107.202 13.95,107.75 14.4,108.2 14.4,108.5 R1.2@14.4,108.75
  Top Layer w0.4: Q1.1 Q1.1@11.052,105.252
  Top Layer w0.5: 14.4,108.5 R2.1 ; R1.2@14.4,108.75 R1.2
NetQ1_2: Q1.2 U1.3 | length 7
  Top Layer w0.5: Q1.2@12.999,104.902 12.999,104.502 17.153,100.347 U1.3
NetQ2_1: 
NetQ2_3: 
NetQ4_1: 
NetQ5_2: Q5.2 U4.4 | length 18.6
  Top Layer w0.3: Q5.2@78.1,43.15 78.125,43.125 78.2,43.05 v1(83.8,43.05) ; v1(80.65,34.25) 80.775,34.375 U4.4
  Bottom Layer w0.3: v1(80.65,34.25) 82.45,34.25 83.8,35.6 v1(83.8,43.05)
NetQ6_1: 
NetQ7_2: 
NetQ7_4: 
NetQ8_2: 
NetQ8_4: 
NetQ9_2: 
NetQ9_4: 
NetQ10_1: 
NetQ10_3: 
NetQ10_3: 
NetQ11_1: 
NetQ11_1: 
NetQ11_3: 
NetQ500_1: 
NetQ501_1: 
NetQ700_1: 
NetQ700_3: 
NetR3_1: R3.1 S1.2 | length 16.8
  Top Layer w0.5: R3.1 46.519,48.25 50.6,48.25 63.02,48.25 S1.2@63.1,48.33
NetR3_2: 
NetR3_2: 
NetR3_2: 
NetR3_2: 
NetR3_2: 
NetR3_2: 
NetR3_2: 
NetR4_1: R4.1 S2.2 | length 17.5
  Top Layer w0.5: S2.2@45.2,37.7 S2.2@45.28,37.62 ; v1(46.35,40.35) R4.1@46.35,42.15
  Bottom Layer w0.5: S2.2@45.28,25.2 45.28,37.7 45.28,38.43 46.35,39.5 v1(46.35,40.35)
NetR4_2: 
NetR5_1: R5.1 S3.2 | length 30.3
  Top Layer w0.5: R5.1 52.644,45.307 v1(52.65,45.3) ; S3.2@50.65,33.9 v1(52.95,33.9) 63.07,33.9 S3.2@63.15,33.98
  Bottom Layer w0.5: v1(52.65,45.3) 52.95,45 v1(52.95,33.9)
NetR5_2: 
NetR6_1: R6.1 S4.2 | length 17.4
  Top Layer w0.5: R6.1@72.45,42.25 72.45,42.207 72.45,40 v1(72.55,39.9)
  Bottom Layer w0.5: v1(72.55,39.9) 73.55,38.9 73.55,37.8 S4.2@73.55,25.3
NetR6_2: 
NetR7_1: R7.1 S5.2 | length 55.4
  Top Layer w0.6: R7.1 60.25,51.2 v1(60.55,51.5)
  Bottom Layer w0.5: S5.2@59.48,11 59.4,11.08 59.4,23.5 59.4,50.35 v1(60.55,51.5)
NetR7_2: 
NetR7_2: 
NetR8_1: 
NetR8_1: 
NetR8_2: 
NetR8_2: 
NetR10_2: R10.2 U2.15 | length 11.4
  Top Layer w0.3: U2.15 35.991,63.948 37.609,65.567 R10.2@37.609,67.467
NetR12_2: R12.2 U2.16 | length 8.4
  Top Layer w0.3: U2.16 33.791,64.598 35.009,65.817 R12.2@35.009,67.417
NetR13_1: R13.1 U2.3 | length 28.8
  Top Layer w0.3: U2.3 20.825,71.098 20.005,71.918 20.005,73.569 21.255,74.819 21.255,80.37 22.256,81.371 22.256,86.422 23.006,87.172 33.008,87.172 R13.1@33.008,87.222
NetR13_2: R13.2 U5.2 | length 6.6
  Top Layer w0.3: U5.2 32.309,92.223 33.015,91.516 R13.2
NetR14_2: 
NetR20_1: 
NetR22_2: 
NetR22_2: 
NetR22_2: 
NetR22_2: 
NetR22_2: 
NetR22_2: 
NetR22_2: 
NetR22_2: 
NetR22_2: 
NetR25_1: 
NetR30_2: 
NetR38_1: 
NetR42_1: 
NetR42_2: 
NetR43_1: 
NetR43_2: 
NetR43_2: 
NetR44_1: 
NetR44_2: 
NetR44_2: 
NetR45_2: 
NetR49_1: 
NetR49_2: 
NetR51_1: 
NetR51_2: 
NetR52_1: 
NetR53_1: 
NetR57_1: 
NetR60_1: 
NetR69_2: 
NetR83_1: 
NetR86_1: 
NetR95_1: 
NetR96_2: 
NetR112_1: 
NetR113_1: 
NetR114_1: 
NetR115_1: 
NetR116_1: 
NetR117_2: 
NetR120_1: 
NetR305_2: 
NetR306_2: 
NetR504_1: 
NetR505_2: 
NetR505_2: 
NetR510_1: 
NetR702_2: 
NetR704_2: 
NetR705_1: 
NetS2_1: 
NetU1_1: 
NetU1_4: 
NetU1_5: 
NetU2_1: U2.1 U3.3 | length 8.7
  Top Layer w0.3: U2.1 21.961,73.824 22.556,74.419 22.556,78.87 23.051,79.365 U3.3
NetU2_2: U2.2 U3.4 | length 12.3
  Top Layer w0.3: U2.2 20.975,71.748 20.555,72.168 20.555,73.318 21.956,74.719 21.956,79.42 23.171,80.635 U3.4
NetU2_5: U2.5 U3.5 | length 19.7
  Top Layer w0.3: U2.5 23.837,69.798 v2@23.856,69.818 ; U3.5 25.491,81.905 v2(26.707,83.121)
  Bottom Layer w0.3: v2(23.956,69.768) 23.956,81.17 25.907,83.121 v2(26.707,83.121)
NetU3_9: U3.9 U3.15 U5.3 X1.1 X3.1 | length 39.9
  Top Layer w0.3: U3.15 16.928,78.095 v2(17.404,77.62) ; U3.9 15.13,86.598 v2(15.354,86.822) 17.554,86.822 17.955,86.422 19.505,86.422 20.105,87.022 20.105,87.972 20.805,88.672 20.805,90.724 U5.3
  Bottom Layer w0.3: v2(15.354,86.822) 16,86.176 X1.1 ; 16.004,78.12 16.904,78.12 v2(17.404,77.62)
NetU3_10: U3.10 U3.16 X2.1 X4.1 | length 27.6
  Top Layer w0.3: v2(14.504,75.769) 15.13,76.395 U3.16 16.248,76.825 16.604,76.469 17.804,76.469 18.555,77.219 18.555,83.221 17.33,84.446 U3.10
  Bottom Layer w0.3: X2.1 13.5,74.765 v2(14.504,75.769)
NetU3_12: U3.12 X7.1 | length 13.2
  Top Layer w0.3: U3.12@15.154,81.871 v2(17.404,81.871)
  Bottom Layer w0.3: X7.1 17.454,90.746 17.454,81.921 v2(17.404,81.871)
NetU3_13: U3.13 X6.1 | length 11.1
  Top Layer w0.3: X6.1 12.953,89.153 12.953,81.32 13.638,80.635 U3.13
NetU3_14: U3.14 X5.1 | length 14.7
  Top Layer w0.3: U3.14 15.134,79.37 v2(17.454,79.37) ; X5.1 18.078,87.622 v2(18.755,87.622)
  Bottom Layer w0.3: v2(17.454,79.37) 18.605,80.52 18.605,87.472 v2(18.755,87.622)
NetU5_1: 
NetU5_4: U5.4 X8.1 | length 6.8
  Top Layer w0.3: X8.1 14.727,90.973 18.057,90.973 U5.4
NetU8_3: 
NetU8_7: 
NetU8_8: 
NetU11_5: 
NetU14_3: 
NetU14_4: 
NetU14_5: 
NetU14_6: 
NetU14_12: 
NetU14_13: 
NetU14_14: 
NetU15_3: 
NetU15_3: 
NetU15_3: 
NetU15_3: 
NetU15_5: 
NetU15_5: 
NetU15_5: 
NetU15_5: 
NetU15_5: 
NetU15_5: 
NetU15_7: 
NetU15_7: 
NetU15_9: 
NetU15_10: 
NetU15_15: 
NetU16_3: 
NetU16_4: 
NetU16_6: 
NetU19_4: 
NetU21_1: 
NetU21_2: 
NetU503_4: 
NetU700_4: 
NetX13_1: 
NetX15_1: 
NetX23_1: 
NetX32_1: 
NetX33_1: 
OFF1: 
OFF2: 
P0_0: 
P0_1: 
P0_2: 
P0_2: 
P0_2: 
P0_2: 
P0_2: 
P0_2: 
P0_3: 
P0_3: 
P0_3: 
P0_3: 
P0_3: 
P0_3: 
P0_3: 
P0_4: 
P0_5: 
P0_6: 
P0_7: 
P0_8: 
P0_8: 
P0_8: 
P0_8: 
P0_8: 
P0_8: 
P0_8: 
P0_8: 
P0_8: 
P0_8: 
P0_8: 
P0_8: 
P0_8: 
P0_8_: 
P0_8_: 
P0_8_: 
P0_9: 
P0_9: 
P0_9: 
P0_9_: 
P0_9_: 
P0_9_: 
P0_9_: 
P0_10: 
P0_11: 
P0_13: 
P0_15: 
P0_16: 
P0_17: 
P0_18: 
P0_19: 
P0_19: 
P0_20: 
P0_21: 
P0_23: 
P0_24: 
P0_25: 
P0_25: 
P0_25: 
P0_25: 
P0_25: 
P0_25: 
P0_25: 
P0_25: 
P0_25: 
P0_25: 
P0_25: 
P0_27: 
P0_27: 
P0_27: 
P0_27: 
P0_27: 
P0_27: 
P0_27: 
P0_27: 
P0_27: 
P0_27: 
P0_27: 
P0_27: 
P0_27: 
P0_28: 
P0_29: 
P0_30: 
P1_0: 
P1_1: 
P1_4: 
P1_8: 
P1_9: 
P1_10: 
P1_14: 
P1_15: 
P1_16: 
P1_17: 
P1_18: 
P1_19: 
P1_20: 
P1_21: 
P1_21: 
P1_22: 
P1_22: 
P1_22: 
P1_22: 
P1_22: 
P1_22: 
P1_22: 
P1_22: 
P1_23: 
P1_24: 
P1_25: 
P1_25: 
P1_25: 
P1_25: 
P1_25: 
P1_25: 
P1_26: 
P1_27: 
P1_28: 
P1_29: 
P1_29: 
P1_29: 
P1_29: 
P1_29: 
P1_30: 
P1_31: 
P1_31: 
P1_31: 
P1_31: 
P1_31: 
P1_31: 
P1_31: 
P1_31: 
P1_31: 
P1_31: 
P1_31: 
P1_31: 
P1_31: 
P1_31: 
P2_0: 
P2_1: 
P2_7: 
P2_8: 
P2_9: 
P2_10: 
P2_13: 
P3_25: 
P3_26: 
PB1: 
PB1: 
PB2: 
PB2: 
PB3: 
PB3: 
PE6: 
PE6: 
PE7: 
PQ3: 
PQ4: 
PQ5: 
PQ6: 
PROG0: 
PROG1: 
PROG1: 
PROG1: 
PWM: 
PWM1: 
PWM2: 
REL1: 
REL1: 
REL2: 
REL3: 
REL4: 
REL5: 
REL6: 
RES: 
RX: 
RXCAN: 
SK1: 
SK2: 
SK3: 
SK4: 
T3: 
T3: 
TD1: 
TX: 
U2: 
U5: 
U6: 
U7: 
U8: 
UAKB: 
UB1: 
UB2: 
UBM1: 
UBM2: 
UIB1: 
UIB2: 
ULOAD: 
US: 
US1: 
US1: 
US1: 
US1: 
US1: 
US1: 
US1: 
US1: 
US1: 
UU1: 
UU2: 
UU3: 
UU4: 
UU5: 
UU6: 
UU7: 
UU8: 
UU9: 
UU10: 
UU11: 
UU12: 
UU13: 
UU14: 
VBAT: 
VREF: 
VS: 
VS: 
pads on no net: J1.0 J1.4 J1.6@32.88,73.55 J1.6@32.88,82.45 J1.6@38.153,73.55 J301.0 J301.7 JP1.9 JP1.10 U1.7 U1.8 U2.6 U2.8 U2.9 U2.10 U2.11 U2.12 U2.13 U2.14 U2.19 U2.22 U2.23 U2.24 U2.27 U2.28 U3.6 U3.11 U4.3
copper on no net:
  other v3: 89.45,6.25 89.45,8.25 35.65,61.3 37.65,61.3 35.65,94.55 37.65,94.55 89.45,102.7 89.45,104.7

## Polygon pours and split planes (outlines as drawn)
GND_USB on Top Layer (hatched 90Degree grid 0.1 track 0.3, remove dead copper): 22.056,90.47 22.056,76.12 20.155,74.296 20.105,74.248 20.105,63.066 40.06,63.066 40.06,92.773 22.056,92.773
NetU700_4 on Top Layer (hatched 90Degree grid 0.1 track 0.3, remove dead copper): 211.8,67.15 211.8,53.35 215.55,49.6 215.55,11.8 223.1,4.25 223.1,0.65 230.95,0.65 230.95,3.3 237,9.35 237,28.8 242.45,34.25 247.05,38.85 247.05,67.55 211.75,67.55 211.75,67
NetC2_1 on Top Layer (hatched 90Degree grid 0.1 track 0.3, remove dead copper): -1.75,113.375 -1.75,45.561 34.7,45.561 34.7,17.7 -4.25,17.7 -4.25,-2.575 91.55,-2.575 91.55,113.6 -1.75,113.6
GND_USB on Bottom Layer (hatched 90Degree grid 0.1 track 0.3, remove dead copper): 40.36,63.066 20.105,63.066 20.105,73.775 22.056,75.591 22.056,92.773 40.31,92.773 40.31,63.112
NetC2_1 on Bottom Layer (hatched 90Degree grid 0.1 track 0.3, remove dead copper): -2.05,113.45 -2.05,49.25 34.625,49.25 34.625,18 -2.95,18 -2.95,-3.175 90.325,-3.175 90.325,113.2 -2.125,113.2

## Keep-outs
Keep-Out Layer:
  circle w0.25: c11.3,120.75 r0
  circle w0.25: c11.3,120.75 r0
  circle w0.25: c11.3,120.75 r0
  circle w0.25: c11.3,120.75 r0
  circle w0.25: c11.3,120.75 r0
  circle w0.25: c11.3,120.75 r0
  circle w0.25: c11.3,120.75 r0
  circle w0.25: c11.3,120.75 r0
  lines w0.25: 9.8,60.35 9.85,60.3 ; 9.8,94.9 9.8,95.55 ; 9.8,95.05 9.8,60.3 33.6,60.3 ; 9.85,95.55 33.55,95.55 ; 11.8,62.3 33.85,62.3 ; 11.8,62.4 11.8,63.65 ; 11.8,62.65 11.8,93.55 ; 11.85,93.55 33.7,93.55 ; 17.5,20 33.25,20 33.25,10 1.75,10 1.75,20 17.55,20 ; 29.7,60.3 78.35,60.3 78.35,95.55 29.8,95.55 ; 33.598,62.309 cw(c33.55,61.35) 33.603,60.391 ; 33.598,95.509 cw(c33.55,94.55) 33.603,93.591 ; 39.5,62.3 76,62.3 76,93.5 ; 39.647,62.309 ccw(c39.7,61.35) 39.652,60.391 ; 39.647,95.509 ccw(c39.7,94.55) 39.652,93.591 ; 39.8,93.55 76,93.55 ; 40.2,62.65 40.2,93.55 ; 78.3,60.3 78.35,60.35 ; 88.491,4.248 cw(c89.45,4.2) 90.409,4.253 ; 88.491,10.297 ccw(c89.45,10.35) 90.409,10.302 ; 88.491,100.698 cw(c89.45,100.65) 90.409,100.703 ; 88.491,106.747 ccw(c89.45,106.8) 90.41,106.752 ; 88.5,10.2 88.5,101 ; 88.5,14.45 88.5,-0.5 -0.5,-0.5 -0.5,111.9 88.5,111.9 88.5,96.55 ; 39.8,95.55 39.8,95.55 ; 41.46,95.55 41.46,95.55

## Silkscreen, mask and mechanical layers (free items; w line width, h text height)
Mechanical 1:
  lines w0.3: 5.45,4.201 7.511,4.201 29.117,25.807 ; 5.451,4.052 7.513,4.052 29.118,25.658
Mechanical 3:
  lines w0.254: 37.545,95.295 37.55,95.3

## Text inside footprints (layer, text, board x,y; h text height)
JP1: Top Overlay "2" at 29.526,23.166 h1.27 r90; Top Overlay "1" at 32.066,23.674 h1.27 r90; Top Overlay "9" at 32.066,37.39 h1.27 r90; Top Overlay "10" at 29.526,37.39 h1.27 r90
JP5: Top Overlay "20" at 44.234,107.832 h1; Top Overlay "19" at 44.234,105.292 h1; Top Overlay "1" at 17.31,105.292 h1; Top Overlay "2" at 17.31,107.832 h1